# EAGLE board MM-Qwiic-Snap-2x1-Panel (EAGLE 9.6.2), part 1 of 2
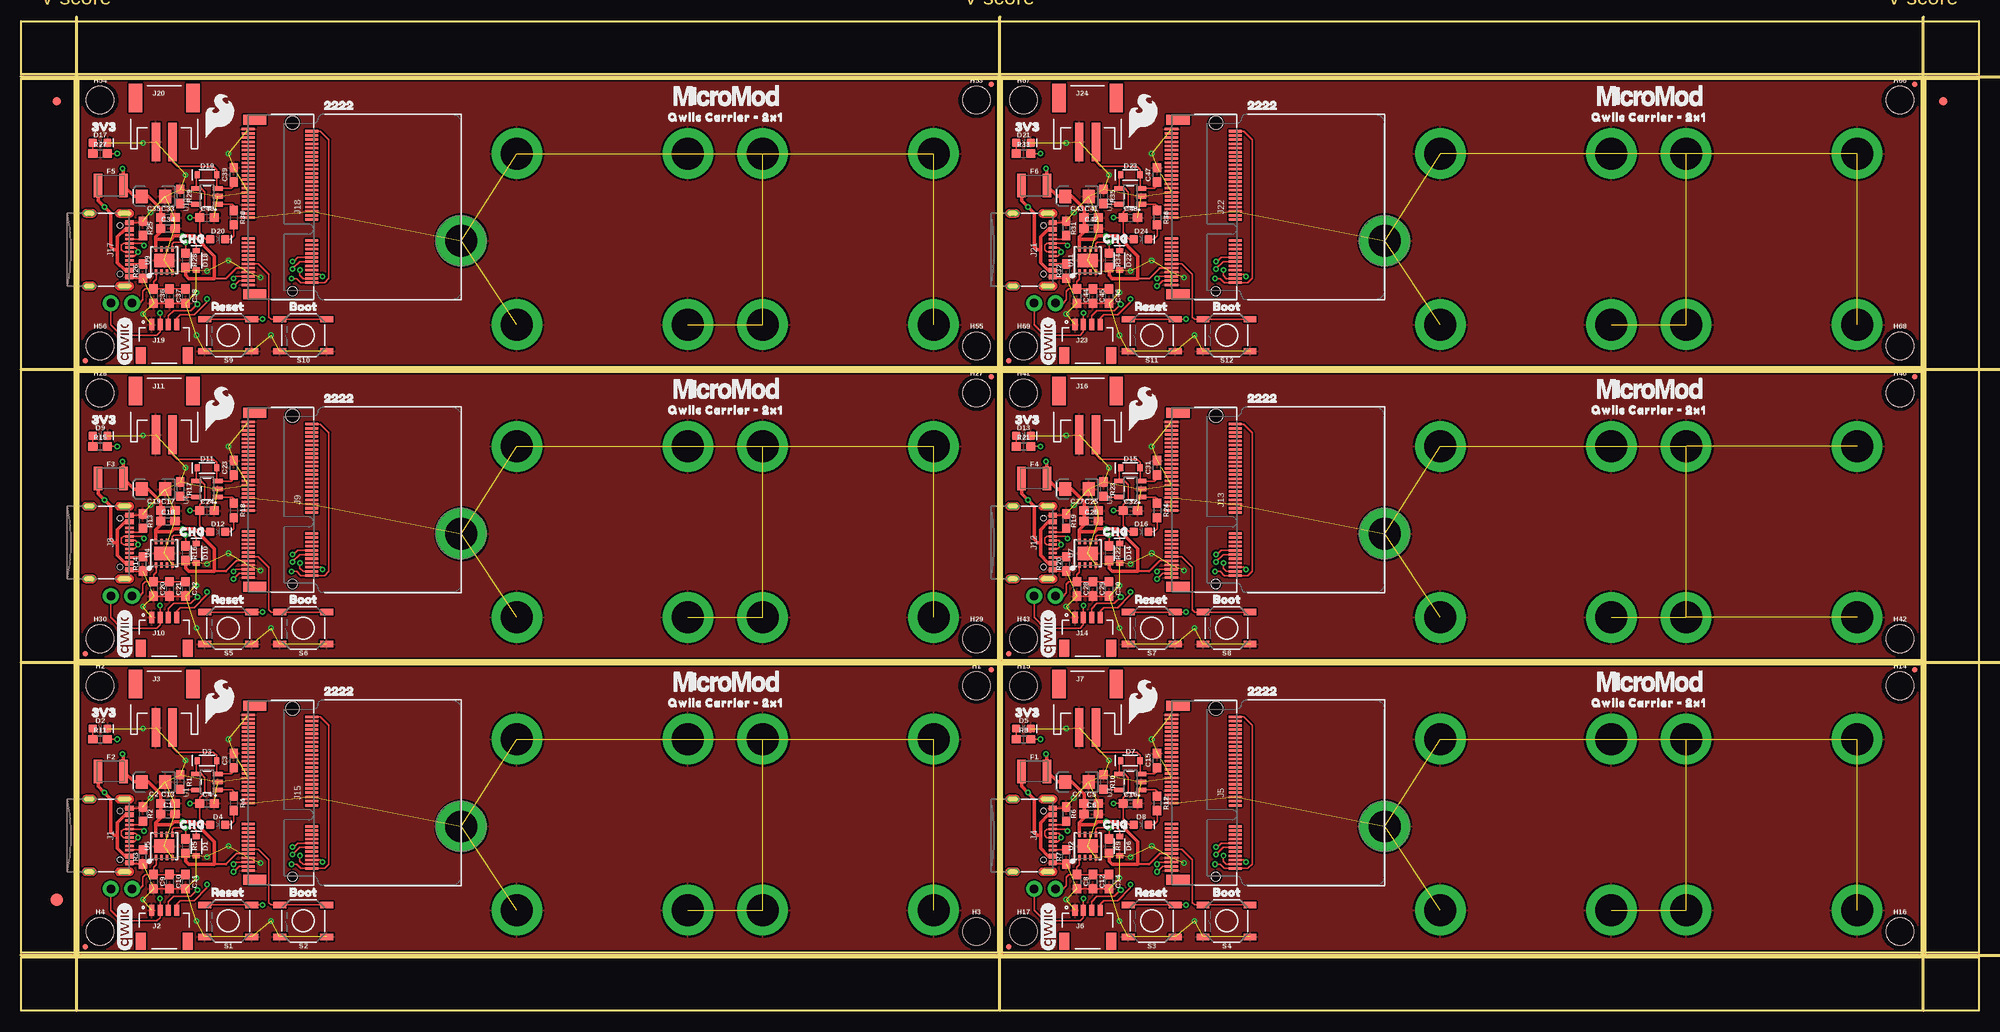
[diagram p0: board, top side]
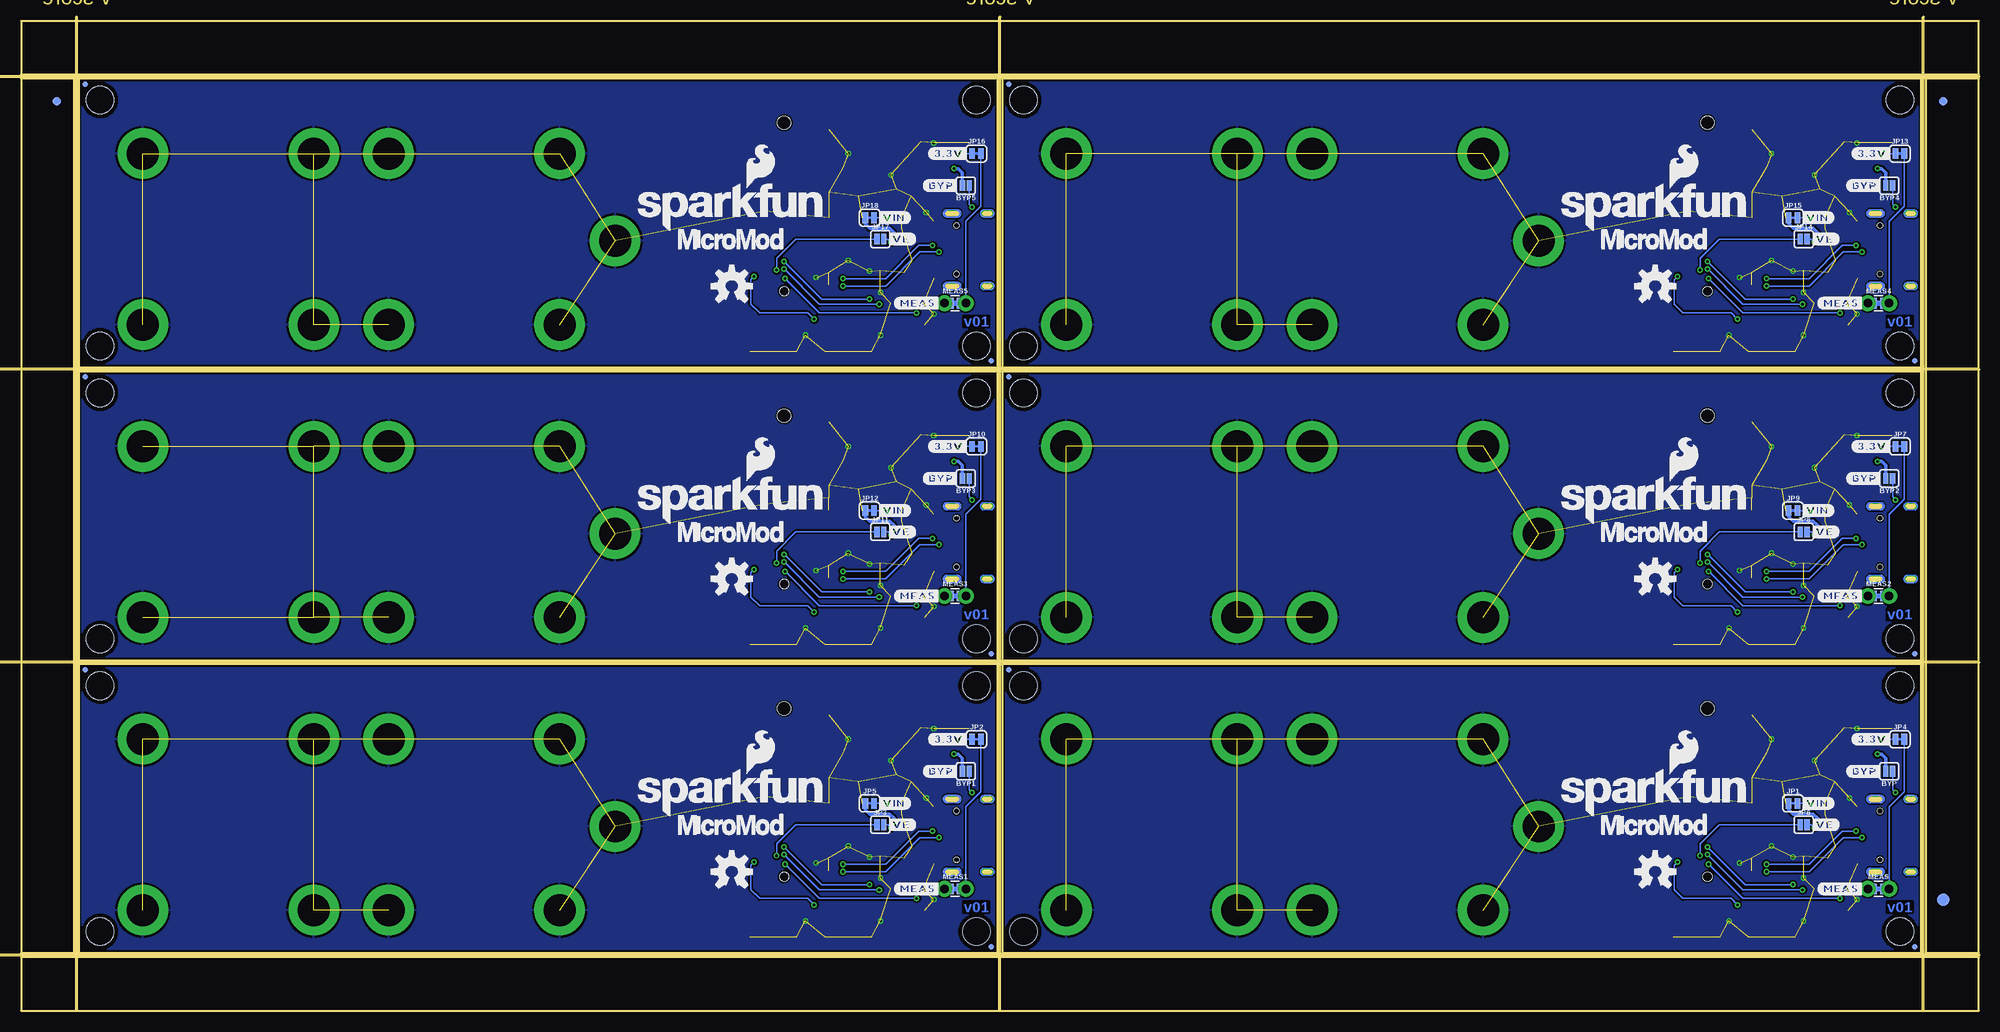
[diagram p1: board, bottom side, seen from below]

Size 232.66 x 117.6 mm. Coordinates in mm from the lower left corner, seen from the top.
Outline: 6.86,6.86 6.86,41.15 116.08,41.15 116.08,6.86 6.86,6.86
Outline: 116.59,6.86 116.59,41.15 225.81,41.15 225.81,6.86 116.59,6.86
Outline: 6.86,41.66 6.86,75.95 116.08,75.95 116.08,41.66 6.86,41.66
Outline: 116.59,41.66 116.59,75.95 225.81,75.95 225.81,41.66 116.59,41.66
Outline: 6.86,76.45 6.86,110.74 116.08,110.74 116.08,76.45 6.86,76.45
Outline: 116.59,76.45 116.59,110.74 225.81,110.74 225.81,76.45 116.59,76.45
Outline: 0,6.35 232.66,6.35 232.66,0 0,0 0,6.35
Outline: 226.31,110.74 232.66,110.74 232.66,6.86 226.31,6.86 226.31,110.74
Outline: 0,117.6 232.66,117.6 232.66,111.25 0,111.25 0,117.6
Outline: 0,110.74 6.35,110.74 6.35,6.86 0,6.86 0,110.74
Copper layers (1*16): Top 0.035mm / dielectric 1.5mm / Bottom 0.035mm
Design rules "MM-Qwiic-Snap-2x1": minimum track width 7mil, minimum drill 12mil, track to track 7mil, track to pad 7mil, pad to pad 7mil, via to via 7mil, smd to smd 7mil, copper to edge 7mil, drill to drill 7mil, minimum pad ring 7mil, minimum via ring 7mil, stop-mask expansion 4mil, vias tented up to drill 25mil, thermal gap 10mil
Net classes: 0 default: width 0 mm, drill 0 mm
Milling: 7 lines

## Footprints (pad centres in the part's own frame; a part is rotated, then mirrored left to right if it is on the bottom)
SMT-JUMPER_2_NO_SILK = smd 0.635 x 1.27: 1 -0.406,0; 2 0.406,0
0603 = smd 1.1 x 1: 1 -0.85,0; 2 0.85,0
EIA3216 = smd 1.4 x 1.6: + 1.4,0; - -1.4,0
SOD-323 = smd 0.63 x 0.83: A 1.15,0; C -1.15,0
LED-0603 = smd 1 x 1: A -0.877,0; C 0.877,0
FIDUCIAL-1X2 = smd 1 x 1: 1 0,0
FIDUCIAL-1.5X3 = smd 1.5 x 1.5: 1 0,0
1210 = smd 1 x 2.8: 1 -1.5,0; 2 1.5,0
FIDUCIAL-MICRO = smd 0.635 x 0.635: 1 0,0
STAND-OFF = hole 3.302: 0,0
STAND-OFF-REFLOW-M2.5 = drill 3.8 pad 6: 1 0,0
USB-C-16P-2LAYER-PADS = smd 0.3 x 1: A5 -1.25,-0.34; A6 -0.25,-0.34; A7 0.25,-0.34; A8 1.25,-0.34; B5 1.75,-0.34; B6 0.75,-0.34; B7 -0.75,-0.34; B8 -1.75,-0.34 | smd 0.6 x 1: GND -3.225,-0.34; GND2 3.225,-0.34; VBUS1 -2.45,-0.34; VBUS2 2.45,-0.34 | drill 0.4 pad 0.6 long: SHLD1 -4.318,-0.915; SHLD2 4.318,-0.915; SHLD3 -4.318,-5.095; SHLD4 4.318,-5.095 | hole 0.65: -2.89,-1.445; 2.89,-1.445
JST04_1MM_RA = smd 0.6 x 1.35: 1 -1.5,0; 2 -0.5,0; 3 0.5,0; 4 1.5,0 | smd 1.2 x 2: NC1 2.8,-3.675; NC2 -2.8,-3.675
JST-2-SMD = smd 1 x 4.6: 1 -1,-3.7; 2 1,-3.7 | smd 1.6 x 3.4: NC1 -3.4,1.5; NC2 3.4,1.5
M.2-CONNECTOR-E = smd 0.3 x 1.55: 1 9.25,-5.275; 2 9,2.275; 3 8.75,-5.275; 4 8.5,2.275; 5 8.25,-5.275; 6 8,2.275; 7 7.75,-5.275; 8 7.5,2.275; 9 7.25,-5.275; 10 7,2.275; 11 6.75,-5.275; 12 6.5,2.275; 13 6.25,-5.275; 14 6,2.275; 15 5.75,-5.275; 16 5.5,2.275; 17 5.25,-5.275; 18 5,2.275; 19 4.75,-5.275; 20 4.5,2.275; 21 4.25,-5.275; 22 4,2.275; 23 3.75,-5.275; 32 1.5,2.275; 33 1.25,-5.275; 34 1,2.275; 35 0.75,-5.275; 36 0.5,2.275; 37 0.25,-5.275; 38 0,2.275; 39 -0.25,-5.275; 40 -0.5,2.275; 41 -0.75,-5.275; 42 -1,2.275; 43 -1.25,-5.275; 44 -1.5,2.275; 45 -1.75,-5.275; 46 -2,2.275; 47 -2.25,-5.275; 48 -2.5,2.275; 49 -2.75,-5.275; 50 -3,2.275; 51 -3.25,-5.275; 52 -3.5,2.275; 53 -3.75,-5.275; 54 -4,2.275; 55 -4.25,-5.275; 56 -4.5,2.275; 57 -4.75,-5.275; 58 -5,2.275; 59 -5.25,-5.275; 60 -5.5,2.275; 61 -5.75,-5.275; 62 -6,2.275; 63 -6.25,-5.275; 64 -6.5,2.275; 65 -6.75,-5.275; 66 -7,2.275; 67 -7.25,-5.275; 68 -7.5,2.275; 69 -7.75,-5.275; 70 -8,2.275; 71 -8.25,-5.275; 72 -8.5,2.275; 73 -8.75,-5.275; 74 -9,2.275; 75 -9.25,-5.275 | smd 1.2 x 2.75: A1 10.35,-4.5; A2 -10.35,-4.5 | hole 1.1: 10,0 | hole 1.6: -10,0
SMT-JUMPER_2_NC_TRACE_SILK = smd 0.66 x 1.27: 1 -0.521,0; 2 0.521,0
COMBO-JUMPER_2_NC_TRACE = smd 0.635 x 1.27: 1 -0.508,0; 2 0.508,0 | drill 1.016 pad 1.88: 3 -1.27,0; 4 1.27,0
TACTILE_SWITCH_SMD_5.2MM = smd 1.524 x 0.762: 1 -2.794,1.905; 2 2.794,1.905; 3 -2.794,-1.905; 4 2.794,-1.905
SOT23-5 = smd 0.55 x 1.2: 1 -0.95,-1.3; 2 0,-1.3; 3 0.95,-1.3; 4 0.95,1.3; 5 -0.95,1.3
UDFN-8 = smd 0.3 x 0.65: 1 -0.975,-1.375; 2 -0.325,-1.375; 3 0.325,-1.375; 4 0.975,-1.375; 5 0.975,1.375; 6 0.325,1.375; 7 -0.325,1.375; 8 -0.975,1.375 | smd 2.35 x 1.6: EP 0,0

## Placement (x,y rotation side)
BYP  JUMPER-SMT_2_NO_SILK  [SMT-JUMPER_2_NO_SILK]  10.67,28.45 180 bottom
BYP1  JUMPER-SMT_2_NO_SILK  [SMT-JUMPER_2_NO_SILK]  120.4,28.45 180 bottom
BYP2  JUMPER-SMT_2_NO_SILK  [SMT-JUMPER_2_NO_SILK]  10.67,63.25 180 bottom
BYP3  JUMPER-SMT_2_NO_SILK  [SMT-JUMPER_2_NO_SILK]  120.4,63.25 180 bottom
BYP4  JUMPER-SMT_2_NO_SILK  [SMT-JUMPER_2_NO_SILK]  10.67,98.04 180 bottom
BYP5  JUMPER-SMT_2_NO_SILK  [SMT-JUMPER_2_NO_SILK]  120.4,98.04 180 bottom
C1  0.1uF  [0603]  17.44,23.37 0 top
C2  10uF  [EIA3216]  15.75,27.18 180 top
C3  4.7uF  [0603]  25.27,29.72 90 top
C4  4.7uF  [0603]  22.1,24.64 0 top
C5  0.22uF  [0603]  127.17,24.64 0 top
C6  0.1uF  [0603]  127.17,23.37 0 top
C7  10uF  [EIA3216]  125.48,27.18 180 top
C8  10uF  [0603]  125.48,15.33 270 top
C9  10uF  [0603]  15.75,15.33 270 top
C10  1.0uF  [0603]  17.65,15.33 270 top
C11  0.22uF  [0603]  19.56,15.33 270 top
C12  1.0uF  [0603]  127.38,15.33 270 top
C13  0.22uF  [0603]  17.44,24.64 0 top
C14  0.22uF  [0603]  129.29,15.33 270 top
C15  4.7uF  [0603]  135,29.72 90 top
C16  4.7uF  [0603]  131.83,24.64 0 top
C17  0.22uF  [0603]  17.44,59.44 0 top
C18  0.1uF  [0603]  17.44,58.17 0 top
C19  10uF  [EIA3216]  15.75,61.98 180 top
C20  10uF  [0603]  15.75,50.13 270 top
C21  1.0uF  [0603]  17.65,50.13 270 top
C22  0.22uF  [0603]  19.56,50.13 270 top
C23  4.7uF  [0603]  25.27,64.52 90 top
C24  4.7uF  [0603]  22.1,59.44 0 top
C25  0.22uF  [0603]  127.17,59.44 0 top
C26  0.1uF  [0603]  127.17,58.17 0 top
C27  10uF  [EIA3216]  125.48,61.98 180 top
C28  10uF  [0603]  125.48,50.13 270 top
C29  1.0uF  [0603]  127.38,50.13 270 top
C30  0.22uF  [0603]  129.29,50.13 270 top
C31  4.7uF  [0603]  135,64.52 90 top
C32  4.7uF  [0603]  131.83,59.44 0 top
C33  0.22uF  [0603]  17.44,94.23 0 top
C34  0.1uF  [0603]  17.44,92.96 0 top
C35  10uF  [EIA3216]  15.75,96.77 180 top
C36  10uF  [0603]  15.75,84.92 270 top
C37  1.0uF  [0603]  17.65,84.92 270 top
C38  0.22uF  [0603]  19.56,84.92 270 top
C39  4.7uF  [0603]  25.27,99.31 90 top
C40  4.7uF  [0603]  22.1,94.23 0 top
C41  0.22uF  [0603]  127.17,94.23 0 top
C42  0.1uF  [0603]  127.17,92.96 0 top
C43  10uF  [EIA3216]  125.48,96.77 180 top
C44  10uF  [0603]  125.48,84.92 270 top
C45  1.0uF  [0603]  127.38,84.92 270 top
C46  0.22uF  [0603]  129.29,84.92 270 top
C47  4.7uF  [0603]  135,99.31 90 top
C48  4.7uF  [0603]  131.83,94.23 0 top
D1  3.3V  [SOD-323]  20.83,19.56 270 top
D2  RED  [LED-0603]  9.4,33.53 0 top
D3  3A/10V/280mV  [SOD-323]  22.1,29.72 0 top
D4  Yellow  [LED-0603]  23.37,22.1 0 top
D5  RED  [LED-0603]  119.13,33.53 0 top
D6  3.3V  [SOD-323]  130.56,19.56 270 top
D7  3A/10V/280mV  [SOD-323]  131.83,29.72 0 top
D8  Yellow  [LED-0603]  133.1,22.1 0 top
D9  RED  [LED-0603]  9.4,68.33 0 top
D10  3.3V  [SOD-323]  20.83,54.36 270 top
D11  3A/10V/280mV  [SOD-323]  22.1,64.52 0 top
D12  Yellow  [LED-0603]  23.37,56.9 0 top
D13  RED  [LED-0603]  119.13,68.33 0 top
D14  3.3V  [SOD-323]  130.56,54.36 270 top
D15  3A/10V/280mV  [SOD-323]  131.83,64.52 0 top
D16  Yellow  [LED-0603]  133.1,56.9 0 top
D17  RED  [LED-0603]  9.4,103.12 0 top
D18  3.3V  [SOD-323]  20.83,89.15 270 top
D19  3A/10V/280mV  [SOD-323]  22.1,99.31 0 top
D20  Yellow  [LED-0603]  23.37,91.69 0 top
D21  RED  [LED-0603]  119.13,103.12 0 top
D22  3.3V  [SOD-323]  130.56,89.15 270 top
D23  3A/10V/280mV  [SOD-323]  131.83,99.31 0 top
D24  Yellow  [LED-0603]  133.1,91.69 0 top
E$1  [FIDUCIAL-1X2]  4.23,108.08 0 top
E$2  [FIDUCIAL-1X2]  4.23,108.08 0 bottom
E$3  [FIDUCIAL-1X2]  228.43,108.08 0 top
E$4  [FIDUCIAL-1X2]  228.43,108.08 0 bottom
E$5  [FIDUCIAL-1.5X3]  4.23,13.21 0 top
E$6  [FIDUCIAL-1.5X3]  4.23,13.21 0 bottom
F1  6V/2A  [1210]  120.4,28.45 0 top
F2  6V/2A  [1210]  10.67,28.45 0 top
F3  6V/2A  [1210]  10.67,63.25 0 top
F4  6V/2A  [1210]  120.4,63.25 0 top
F5  6V/2A  [1210]  10.67,98.04 0 top
F6  6V/2A  [1210]  120.4,98.04 0 top
FD1  FIDUCIALUFIDUCIAL  [FIDUCIAL-MICRO]  7.62,7.62 0 top
FD2  FIDUCIALUFIDUCIAL  [FIDUCIAL-MICRO]  115.32,40.51 0 top
FD3  FIDUCIALUFIDUCIAL  [FIDUCIAL-MICRO]  7.62,7.62 0 bottom
FD4  FIDUCIALUFIDUCIAL  [FIDUCIAL-MICRO]  115.32,40.51 0 bottom
FD5  FIDUCIALUFIDUCIAL  [FIDUCIAL-MICRO]  117.35,7.62 0 top
FD6  FIDUCIALUFIDUCIAL  [FIDUCIAL-MICRO]  225.04,40.51 0 top
FD7  FIDUCIALUFIDUCIAL  [FIDUCIAL-MICRO]  117.35,7.62 0 bottom
FD8  FIDUCIALUFIDUCIAL  [FIDUCIAL-MICRO]  225.04,40.51 0 bottom
FD9  FIDUCIALUFIDUCIAL  [FIDUCIAL-MICRO]  7.62,42.42 0 top
FD10  FIDUCIALUFIDUCIAL  [FIDUCIAL-MICRO]  115.32,75.31 0 top
FD11  FIDUCIALUFIDUCIAL  [FIDUCIAL-MICRO]  7.62,42.42 0 bottom
FD12  FIDUCIALUFIDUCIAL  [FIDUCIAL-MICRO]  115.32,75.31 0 bottom
FD13  FIDUCIALUFIDUCIAL  [FIDUCIAL-MICRO]  117.35,42.42 0 top
FD14  FIDUCIALUFIDUCIAL  [FIDUCIAL-MICRO]  225.04,75.31 0 top
FD15  FIDUCIALUFIDUCIAL  [FIDUCIAL-MICRO]  117.35,42.42 0 bottom
FD16  FIDUCIALUFIDUCIAL  [FIDUCIAL-MICRO]  225.04,75.31 0 bottom
FD17  FIDUCIALUFIDUCIAL  [FIDUCIAL-MICRO]  7.62,77.22 0 top
FD18  FIDUCIALUFIDUCIAL  [FIDUCIAL-MICRO]  115.32,110.11 0 top
FD19  FIDUCIALUFIDUCIAL  [FIDUCIAL-MICRO]  7.62,77.22 0 bottom
FD20  FIDUCIALUFIDUCIAL  [FIDUCIAL-MICRO]  115.32,110.11 0 bottom
FD21  FIDUCIALUFIDUCIAL  [FIDUCIAL-MICRO]  117.35,77.22 0 top
FD22  FIDUCIALUFIDUCIAL  [FIDUCIAL-MICRO]  225.04,110.11 0 top
FD23  FIDUCIALUFIDUCIAL  [FIDUCIAL-MICRO]  117.35,77.22 0 bottom
FD24  FIDUCIALUFIDUCIAL  [FIDUCIAL-MICRO]  225.04,110.11 0 bottom
H1  STAND-OFF  [STAND-OFF]  113.54,38.61 0 top
H2  STAND-OFF  [STAND-OFF]  9.4,38.61 0 top
H3  STAND-OFF  [STAND-OFF]  113.54,9.4 0 top
H4  STAND-OFF  [STAND-OFF]  9.4,9.4 0 top
H5  STAND-OFF-REFLOW2.5MM_TALL  [STAND-OFF-REFLOW-M2.5]  52.33,21.89 0 top
H6  STAND-OFF-REFLOW2.5MM_TALL  [STAND-OFF-REFLOW-M2.5]  58.93,32.26 0 top
H7  STAND-OFF-REFLOW2.5MM_TALL  [STAND-OFF-REFLOW-M2.5]  58.93,11.94 0 top
H8  STAND-OFF-REFLOW2.5MM_TALL  [STAND-OFF-REFLOW-M2.5]  79.25,11.94 0 top
H9  STAND-OFF-REFLOW2.5MM_TALL  [STAND-OFF-REFLOW-M2.5]  79.25,32.26 0 top
H10  STAND-OFF-REFLOW2.5MM_TALL  [STAND-OFF-REFLOW-M2.5]  88.14,32.26 0 top
H11  STAND-OFF-REFLOW2.5MM_TALL  [STAND-OFF-REFLOW-M2.5]  108.46,32.26 0 top
H12  STAND-OFF-REFLOW2.5MM_TALL  [STAND-OFF-REFLOW-M2.5]  108.46,11.94 0 top
H13  STAND-OFF-REFLOW2.5MM_TALL  [STAND-OFF-REFLOW-M2.5]  88.14,11.94 0 top
H14  STAND-OFF  [STAND-OFF]  223.27,38.61 0 top
H15  STAND-OFF  [STAND-OFF]  119.13,38.61 0 top
H16  STAND-OFF  [STAND-OFF]  223.27,9.4 0 top
H17  STAND-OFF  [STAND-OFF]  119.13,9.4 0 top
H18  STAND-OFF-REFLOW2.5MM_TALL  [STAND-OFF-REFLOW-M2.5]  162.06,21.89 0 top
H19  STAND-OFF-REFLOW2.5MM_TALL  [STAND-OFF-REFLOW-M2.5]  168.66,32.26 0 top
H20  STAND-OFF-REFLOW2.5MM_TALL  [STAND-OFF-REFLOW-M2.5]  168.66,11.94 0 top
H21  STAND-OFF-REFLOW2.5MM_TALL  [STAND-OFF-REFLOW-M2.5]  188.98,11.94 0 top
H22  STAND-OFF-REFLOW2.5MM_TALL  [STAND-OFF-REFLOW-M2.5]  188.98,32.26 0 top
H23  STAND-OFF-REFLOW2.5MM_TALL  [STAND-OFF-REFLOW-M2.5]  197.87,32.26 0 top
H24  STAND-OFF-REFLOW2.5MM_TALL  [STAND-OFF-REFLOW-M2.5]  218.19,32.26 0 top
H25  STAND-OFF-REFLOW2.5MM_TALL  [STAND-OFF-REFLOW-M2.5]  218.19,11.94 0 top
H26  STAND-OFF-REFLOW2.5MM_TALL  [STAND-OFF-REFLOW-M2.5]  197.87,11.94 0 top
H27  STAND-OFF  [STAND-OFF]  113.54,73.41 0 top
H28  STAND-OFF  [STAND-OFF]  9.4,73.41 0 top
H29  STAND-OFF  [STAND-OFF]  113.54,44.2 0 top
H30  STAND-OFF  [STAND-OFF]  9.4,44.2 0 top
H31  STAND-OFF-REFLOW2.5MM_TALL  [STAND-OFF-REFLOW-M2.5]  52.33,56.69 0 top
H32  STAND-OFF-REFLOW2.5MM_TALL  [STAND-OFF-REFLOW-M2.5]  58.93,67.06 0 top
H33  STAND-OFF-REFLOW2.5MM_TALL  [STAND-OFF-REFLOW-M2.5]  58.93,46.74 0 top
H34  STAND-OFF-REFLOW2.5MM_TALL  [STAND-OFF-REFLOW-M2.5]  79.25,46.74 0 top
H35  STAND-OFF-REFLOW2.5MM_TALL  [STAND-OFF-REFLOW-M2.5]  79.25,67.06 0 top
H36  STAND-OFF-REFLOW2.5MM_TALL  [STAND-OFF-REFLOW-M2.5]  88.14,67.06 0 top
H37  STAND-OFF-REFLOW2.5MM_TALL  [STAND-OFF-REFLOW-M2.5]  108.46,67.06 0 top
H38  STAND-OFF-REFLOW2.5MM_TALL  [STAND-OFF-REFLOW-M2.5]  108.46,46.74 0 top
H39  STAND-OFF-REFLOW2.5MM_TALL  [STAND-OFF-REFLOW-M2.5]  88.14,46.74 0 top
H40  STAND-OFF  [STAND-OFF]  223.27,73.41 0 top
H41  STAND-OFF  [STAND-OFF]  119.13,73.41 0 top
H42  STAND-OFF  [STAND-OFF]  223.27,44.2 0 top
H43  STAND-OFF  [STAND-OFF]  119.13,44.2 0 top
H44  STAND-OFF-REFLOW2.5MM_TALL  [STAND-OFF-REFLOW-M2.5]  162.06,56.69 0 top
H45  STAND-OFF-REFLOW2.5MM_TALL  [STAND-OFF-REFLOW-M2.5]  168.66,67.06 0 top
H46  STAND-OFF-REFLOW2.5MM_TALL  [STAND-OFF-REFLOW-M2.5]  168.66,46.74 0 top
H47  STAND-OFF-REFLOW2.5MM_TALL  [STAND-OFF-REFLOW-M2.5]  188.98,46.74 0 top
H48  STAND-OFF-REFLOW2.5MM_TALL  [STAND-OFF-REFLOW-M2.5]  188.98,67.06 0 top
H49  STAND-OFF-REFLOW2.5MM_TALL  [STAND-OFF-REFLOW-M2.5]  197.87,67.06 0 top
H50  STAND-OFF-REFLOW2.5MM_TALL  [STAND-OFF-REFLOW-M2.5]  218.19,67.06 0 top
H51  STAND-OFF-REFLOW2.5MM_TALL  [STAND-OFF-REFLOW-M2.5]  218.19,46.74 0 top
H52  STAND-OFF-REFLOW2.5MM_TALL  [STAND-OFF-REFLOW-M2.5]  197.87,46.74 0 top
H53  STAND-OFF  [STAND-OFF]  113.54,108.2 0 top
H54  STAND-OFF  [STAND-OFF]  9.4,108.2 0 top
H55  STAND-OFF  [STAND-OFF]  113.54,78.99 0 top
H56  STAND-OFF  [STAND-OFF]  9.4,78.99 0 top
H57  STAND-OFF-REFLOW2.5MM_TALL  [STAND-OFF-REFLOW-M2.5]  52.33,91.48 0 top
H58  STAND-OFF-REFLOW2.5MM_TALL  [STAND-OFF-REFLOW-M2.5]  58.93,101.85 0 top
H59  STAND-OFF-REFLOW2.5MM_TALL  [STAND-OFF-REFLOW-M2.5]  58.93,81.53 0 top
H60  STAND-OFF-REFLOW2.5MM_TALL  [STAND-OFF-REFLOW-M2.5]  79.25,81.53 0 top
H61  STAND-OFF-REFLOW2.5MM_TALL  [STAND-OFF-REFLOW-M2.5]  79.25,101.85 0 top
H62  STAND-OFF-REFLOW2.5MM_TALL  [STAND-OFF-REFLOW-M2.5]  88.14,101.85 0 top
H63  STAND-OFF-REFLOW2.5MM_TALL  [STAND-OFF-REFLOW-M2.5]  108.46,101.85 0 top
H64  STAND-OFF-REFLOW2.5MM_TALL  [STAND-OFF-REFLOW-M2.5]  108.46,81.53 0 top
H65  STAND-OFF-REFLOW2.5MM_TALL  [STAND-OFF-REFLOW-M2.5]  88.14,81.53 0 top
H66  STAND-OFF  [STAND-OFF]  223.27,108.2 0 top
H67  STAND-OFF  [STAND-OFF]  119.13,108.2 0 top
H68  STAND-OFF  [STAND-OFF]  223.27,78.99 0 top
H69  STAND-OFF  [STAND-OFF]  119.13,78.99 0 top
H70  STAND-OFF-REFLOW2.5MM_TALL  [STAND-OFF-REFLOW-M2.5]  162.06,91.48 0 top
H71  STAND-OFF-REFLOW2.5MM_TALL  [STAND-OFF-REFLOW-M2.5]  168.66,101.85 0 top
H72  STAND-OFF-REFLOW2.5MM_TALL  [STAND-OFF-REFLOW-M2.5]  168.66,81.53 0 top
H73  STAND-OFF-REFLOW2.5MM_TALL  [STAND-OFF-REFLOW-M2.5]  188.98,81.53 0 top
H74  STAND-OFF-REFLOW2.5MM_TALL  [STAND-OFF-REFLOW-M2.5]  188.98,101.85 0 top
H75  STAND-OFF-REFLOW2.5MM_TALL  [STAND-OFF-REFLOW-M2.5]  197.87,101.85 0 top
H76  STAND-OFF-REFLOW2.5MM_TALL  [STAND-OFF-REFLOW-M2.5]  218.19,101.85 0 top
H77  STAND-OFF-REFLOW2.5MM_TALL  [STAND-OFF-REFLOW-M2.5]  218.19,81.53 0 top
H78  STAND-OFF-REFLOW2.5MM_TALL  [STAND-OFF-REFLOW-M2.5]  197.87,81.53 0 top
J1  [USB-C-16P-2LAYER-PADS]  13.21,20.83 270 top
J2  QWIIC_RIGHT_ANGLE  [JST04_1MM_RA]  17.02,11.94 0 top
J3  [JST-2-SMD]  17.02,37.34 0 top
J4  [USB-C-16P-2LAYER-PADS]  122.94,20.83 270 top
J5  MICROMOD-2222-C  [M.2-CONNECTOR-E]  141.99,25.91 270 top
J6  QWIIC_RIGHT_ANGLE  [JST04_1MM_RA]  126.75,11.94 0 top
J7  [JST-2-SMD]  126.75,37.34 0 top
J8  [USB-C-16P-2LAYER-PADS]  13.21,55.63 270 top
J9  MICROMOD-2222-C  [M.2-CONNECTOR-E]  32.26,60.71 270 top
J10  QWIIC_RIGHT_ANGLE  [JST04_1MM_RA]  17.02,46.74 0 top
J11  [JST-2-SMD]  17.02,72.14 0 top
J12  [USB-C-16P-2LAYER-PADS]  122.94,55.63 270 top
J13  MICROMOD-2222-C  [M.2-CONNECTOR-E]  141.99,60.71 270 top
J14  QWIIC_RIGHT_ANGLE  [JST04_1MM_RA]  126.75,46.74 0 top
J15  MICROMOD-2222-C  [M.2-CONNECTOR-E]  32.26,25.91 270 top
J16  [JST-2-SMD]  126.75,72.14 0 top
J17  [USB-C-16P-2LAYER-PADS]  13.21,90.42 270 top
J18  MICROMOD-2222-C  [M.2-CONNECTOR-E]  32.26,95.5 270 top
J19  QWIIC_RIGHT_ANGLE  [JST04_1MM_RA]  17.02,81.53 0 top
J20  [JST-2-SMD]  17.02,106.93 0 top
J21  [USB-C-16P-2LAYER-PADS]  122.94,90.42 270 top
J22  MICROMOD-2222-C  [M.2-CONNECTOR-E]  141.99,95.5 270 top
J23  QWIIC_RIGHT_ANGLE  [JST04_1MM_RA]  126.75,81.53 0 top
J24  [JST-2-SMD]  126.75,106.93 0 top
JP1  JUMPER-SMT_2_NC_TRACE_SILK  [SMT-JUMPER_2_NC_TRACE_SILK]  22.1,24.64 0 bottom
JP2  3V3 LED  [SMT-JUMPER_2_NC_TRACE_SILK]  119.13,32.26 0 bottom
JP3  VE  [SMT-JUMPER_2_NO_SILK]  130.56,22.1 0 bottom
JP4  3V3 LED  [SMT-JUMPER_2_NC_TRACE_SILK]  9.4,32.26 0 bottom
JP5  JUMPER-SMT_2_NC_TRACE_SILK  [SMT-JUMPER_2_NC_TRACE_SILK]  131.83,24.64 0 bottom
JP6  VE  [SMT-JUMPER_2_NO_SILK]  20.83,22.1 0 bottom
JP7  3V3 LED  [SMT-JUMPER_2_NC_TRACE_SILK]  9.4,67.06 0 bottom
JP8  VE  [SMT-JUMPER_2_NO_SILK]  20.83,56.9 0 bottom
JP9  JUMPER-SMT_2_NC_TRACE_SILK  [SMT-JUMPER_2_NC_TRACE_SILK]  22.1,59.44 0 bottom
JP10  3V3 LED  [SMT-JUMPER_2_NC_TRACE_SILK]  119.13,67.06 0 bottom
JP11  VE  [SMT-JUMPER_2_NO_SILK]  130.56,56.9 0 bottom
JP12  JUMPER-SMT_2_NC_TRACE_SILK  [SMT-JUMPER_2_NC_TRACE_SILK]  131.83,59.44 0 bottom
JP13  3V3 LED  [SMT-JUMPER_2_NC_TRACE_SILK]  9.4,101.85 0 bottom
JP14  VE  [SMT-JUMPER_2_NO_SILK]  20.83,91.69 0 bottom
JP15  JUMPER-SMT_2_NC_TRACE_SILK  [SMT-JUMPER_2_NC_TRACE_SILK]  22.1,94.23 0 bottom
JP16  3V3 LED  [SMT-JUMPER_2_NC_TRACE_SILK]  119.13,101.85 0 bottom
JP17  VE  [SMT-JUMPER_2_NO_SILK]  130.56,91.69 0 bottom
JP18  JUMPER-SMT_2_NC_TRACE_SILK  [SMT-JUMPER_2_NC_TRACE_SILK]  131.83,94.23 0 bottom
LOGO1  SFE_LOGO_NAME_FLAME.2_INCH  [SFE_LOGO_NAME_FLAME_.2]  38.61,25.91 0 bottom
LOGO2  QWIIC_LOGO_CONNECTOR  [QWIIC_5.5MM]  12.32,9.97 90 top
LOGO3  OSHW-LOGOM  [OSHW-LOGO-M]  38.48,16.51 0 bottom
LOGO4  QWIIC_LOGO_CONNECTOR  [QWIIC_5.5MM]  122.05,9.97 90 top
LOGO5  OSHW-LOGOM  [OSHW-LOGO-M]  148.21,16.51 0 bottom
LOGO6  SFE_LOGO_NAME_FLAME.2_INCH  [SFE_LOGO_NAME_FLAME_.2]  148.34,25.91 0 bottom
LOGO7  QWIIC_LOGO_CONNECTOR  [QWIIC_5.5MM]  12.32,44.77 90 top
LOGO8  OSHW-LOGOM  [OSHW-LOGO-M]  38.48,51.31 0 bottom
LOGO9  SFE_LOGO_NAME_FLAME.2_INCH  [SFE_LOGO_NAME_FLAME_.2]  38.61,60.71 0 bottom
LOGO10  QWIIC_LOGO_CONNECTOR  [QWIIC_5.5MM]  122.05,44.77 90 top
LOGO11  OSHW-LOGOM  [OSHW-LOGO-M]  148.21,51.31 0 bottom
LOGO12  SFE_LOGO_NAME_FLAME.2_INCH  [SFE_LOGO_NAME_FLAME_.2]  148.34,60.71 0 bottom
LOGO13  QWIIC_LOGO_CONNECTOR  [QWIIC_5.5MM]  12.32,79.57 90 top
LOGO14  OSHW-LOGOM  [OSHW-LOGO-M]  38.48,86.11 0 bottom
LOGO15  SFE_LOGO_NAME_FLAME.2_INCH  [SFE_LOGO_NAME_FLAME_.2]  38.61,95.5 0 bottom
LOGO16  QWIIC_LOGO_CONNECTOR  [QWIIC_5.5MM]  122.05,79.57 90 top
LOGO17  OSHW-LOGOM  [OSHW-LOGO-M]  148.21,86.11 0 bottom
LOGO18  SFE_LOGO_NAME_FLAME.2_INCH  [SFE_LOGO_NAME_FLAME_.2]  148.34,95.5 0 bottom
MEAS  [COMBO-JUMPER_2_NC_TRACE]  11.94,14.48 0 bottom
MEAS1  [COMBO-JUMPER_2_NC_TRACE]  121.67,14.48 0 bottom
MEAS2  [COMBO-JUMPER_2_NC_TRACE]  11.94,49.28 0 bottom
MEAS3  [COMBO-JUMPER_2_NC_TRACE]  121.67,49.28 0 bottom
MEAS4  [COMBO-JUMPER_2_NC_TRACE]  11.94,84.07 0 bottom
MEAS5  [COMBO-JUMPER_2_NC_TRACE]  121.67,84.07 0 bottom
R1  2.2k  [0603]  18.92,27.18 270 top
R2  5.1k  [0603]  14.48,23.37 270 top
R3  5.1k  [0603]  14.48,18.29 90 top
R4  1k  [0603]  25.27,24.64 270 top
R5  100k  [0603]  19.56,19.56 270 top
R6  5.1k  [0603]  124.21,23.37 270 top
R7  5.1k  [0603]  124.21,18.29 90 top
R8  1k  [0603]  119.13,32.26 0 top
R9  100k  [0603]  129.29,19.56 270 top
R10  2.2k  [0603]  128.65,27.18 270 top
R11  1k  [0603]  9.4,32.26 0 top
R12  1k  [0603]  135,24.64 270 top
R13  5.1k  [0603]  14.48,58.17 270 top
R14  5.1k  [0603]  14.48,53.09 90 top
R15  1k  [0603]  9.4,67.06 0 top
R16  100k  [0603]  19.56,54.36 270 top
R17  2.2k  [0603]  18.92,61.98 270 top
R18  1k  [0603]  25.27,59.44 270 top
R19  5.1k  [0603]  124.21,58.17 270 top
R20  5.1k  [0603]  124.21,53.09 90 top
R21  1k  [0603]  119.13,67.06 0 top
R22  100k  [0603]  129.29,54.36 270 top
R23  2.2k  [0603]  128.65,61.98 270 top
R24  1k  [0603]  135,59.44 270 top
R25  5.1k  [0603]  14.48,92.96 270 top
R26  5.1k  [0603]  14.48,87.88 90 top
R27  1k  [0603]  9.4,101.85 0 top
R28  100k  [0603]  19.56,89.15 270 top
R29  2.2k  [0603]  18.92,96.77 270 top
R30  1k  [0603]  25.27,94.23 270 top
R31  5.1k  [0603]  124.21,92.96 270 top
R32  5.1k  [0603]  124.21,87.88 90 top
R33  1k  [0603]  119.13,101.85 0 top
R34  100k  [0603]  129.29,89.15 270 top
R35  2.2k  [0603]  128.65,96.77 270 top
R36  1k  [0603]  135,94.23 270 top
S1  Reset  [TACTILE_SWITCH_SMD_5.2MM]  24.64,10.67 180 top
S2  BOOT  [TACTILE_SWITCH_SMD_5.2MM]  33.53,10.67 180 top
S3  Reset  [TACTILE_SWITCH_SMD_5.2MM]  134.37,10.67 180 top
S4  BOOT  [TACTILE_SWITCH_SMD_5.2MM]  143.26,10.67 180 top
S5  Reset  [TACTILE_SWITCH_SMD_5.2MM]  24.64,45.47 180 top
S6  BOOT  [TACTILE_SWITCH_SMD_5.2MM]  33.53,45.47 180 top
S7  Reset  [TACTILE_SWITCH_SMD_5.2MM]  134.37,45.47 180 top
S8  BOOT  [TACTILE_SWITCH_SMD_5.2MM]  143.26,45.47 180 top
S9  Reset  [TACTILE_SWITCH_SMD_5.2MM]  24.64,80.26 180 top
S10  BOOT  [TACTILE_SWITCH_SMD_5.2MM]  33.53,80.26 180 top
S11  Reset  [TACTILE_SWITCH_SMD_5.2MM]  134.37,80.26 180 top
S12  BOOT  [TACTILE_SWITCH_SMD_5.2MM]  143.26,80.26 180 top
U1  MCP73831  [SOT23-5]  22.1,27.18 90 top
U2  AP7361C-33FGEUDFN-8  [UDFN-8]  126.75,19.56 0 top
U3  MCP73831  [SOT23-5]  131.83,27.18 90 top
U4  AP7361C-33FGEUDFN-8  [UDFN-8]  17.02,54.36 0 top
U5  AP7361C-33FGEUDFN-8  [UDFN-8]  17.02,19.56 0 top
U6  MCP73831  [SOT23-5]  22.1,61.98 90 top
U7  AP7361C-33FGEUDFN-8  [UDFN-8]  126.75,54.36 0 top
U8  MCP73831  [SOT23-5]  131.83,61.98 90 top
U9  AP7361C-33FGEUDFN-8  [UDFN-8]  17.02,89.15 0 top
U10  MCP73831  [SOT23-5]  22.1,96.77 90 top
U11  AP7361C-33FGEUDFN-8  [UDFN-8]  126.75,89.15 0 top
U12  MCP73831  [SOT23-5]  131.83,96.77 90 top
U$1  [3V31]  7.49,35.43 0 top
U$2  [RESET3]  21.72,14.1 0 top
U$3  [RESET3]  131.44,14.1 0 top
U$4  [CHG0]  18.16,22.1 0 top
U$5  [#VIN#0]  21.21,24.64 0 bottom
U$6  [#3#3V#0]  15.11,32.26 0 bottom
U$7  [#BYP#0]  15.75,28.45 0 bottom
U$8  [#VE#0]  20.07,22.1 0 bottom
U$9  [#MEAS#0]  19.18,14.48 0 bottom
U$10  [QWIIC_CARRIER_#_2X10]  76.2,36.58 0 top
U$11  [BOOT2]  140.72,14.1 0 top
U$12  [22229]  144.82,37.98 0 top
U$13  [3V31]  117.22,35.43 0 top
U$14  [SFE_LOGO_FLAME_.2]  133.35,36.7 0 top
U$15  [MICROMOD_LOGO_.5]  193.55,39.12 0 top
U$16  [MICROMOD_LOGO_.5]  148.34,22.1 0 bottom
U$17  [CHG0]  127.89,22.1 0 top
U$18  [#3#3V#0]  124.84,32.26 0 bottom
U$19  [BOOT2]  30.99,14.1 0 top
U$20  [#BYP#0]  125.48,28.45 0 bottom
U$21  [#MEAS#0]  128.91,14.48 0 bottom
U$22  [#VIN#0]  130.94,24.64 0 bottom
U$23  [#VE#0]  129.79,22.1 0 bottom
U$24  [QWIIC_CARRIER_#_2X10]  185.93,36.58 0 top
U$25  [RESET3]  21.72,48.89 0 top
U$26  [BOOT2]  30.99,48.89 0 top
U$27  [22229]  35.09,72.78 0 top
U$28  [3V31]  7.49,70.23 0 top
U$29  [SFE_LOGO_FLAME_.2]  23.62,71.5 0 top
U$30  [MICROMOD_LOGO_.5]  83.82,73.91 0 top
U$31  [MICROMOD_LOGO_.5]  38.61,56.9 0 bottom
U$32  [CHG0]  18.16,56.9 0 top
U$33  [#3#3V#0]  15.11,67.06 0 bottom
U$34  [#BYP#0]  15.75,63.25 0 bottom
U$35  [#MEAS#0]  19.18,49.28 0 bottom
U$36  [#VIN#0]  21.21,59.44 0 bottom
U$37  [#VE#0]  20.07,56.9 0 bottom
U$38  [QWIIC_CARRIER_#_2X10]  76.2,71.37 0 top
U$39  [RESET3]  131.44,48.89 0 top
U$40  [BOOT2]  140.72,48.89 0 top
U$41  [22229]  144.82,72.78 0 top
U$42  [3V31]  117.22,70.23 0 top
U$43  [SFE_LOGO_FLAME_.2]  133.35,71.5 0 top
U$44  [SFE_LOGO_FLAME_.2]  23.62,36.7 0 top
U$45  [MICROMOD_LOGO_.5]  193.55,73.91 0 top
U$46  [MICROMOD_LOGO_.5]  148.34,56.9 0 bottom
U$47  [CHG0]  127.89,56.9 0 top
U$48  [#3#3V#0]  124.84,67.06 0 bottom
U$49  [#BYP#0]  125.48,63.25 0 bottom
U$50  [#MEAS#0]  128.91,49.28 0 bottom
U$51  [#VIN#0]  130.94,59.44 0 bottom
U$52  [#VE#0]  129.79,56.9 0 bottom
U$53  [QWIIC_CARRIER_#_2X10]  185.93,71.37 0 top
U$54  [RESET3]  21.72,83.69 0 top
U$55  [22229]  35.09,37.98 0 top
U$56  [BOOT2]  30.99,83.69 0 top
U$57  [22229]  35.09,107.57 0 top
U$58  [3V31]  7.49,105.03 0 top
U$59  [SFE_LOGO_FLAME_.2]  23.62,106.3 0 top
U$60  [MICROMOD_LOGO_.5]  83.82,108.71 0 top
U$61  [MICROMOD_LOGO_.5]  38.61,91.69 0 bottom
U$62  [CHG0]  18.16,91.69 0 top
U$63  [#3#3V#0]  15.11,101.85 0 bottom
U$64  [#BYP#0]  15.75,98.04 0 bottom
U$65  [#MEAS#0]  19.18,84.07 0 bottom
U$66  [#VIN#0]  21.21,94.23 0 bottom
U$67  [MICROMOD_LOGO_.5]  83.82,39.12 0 top
U$68  [MICROMOD_LOGO_.5]  38.61,22.1 0 bottom
U$69  [#VE#0]  20.07,91.69 0 bottom
U$70  [QWIIC_CARRIER_#_2X10]  76.2,106.17 0 top
U$71  [RESET3]  131.44,83.69 0 top
U$72  [BOOT2]  140.72,83.69 0 top
U$73  [22229]  144.82,107.57 0 top
U$74  [3V31]  117.22,105.03 0 top
U$75  [SFE_LOGO_FLAME_.2]  133.35,106.3 0 top
U$76  [MICROMOD_LOGO_.5]  193.55,108.71 0 top
U$77  [MICROMOD_LOGO_.5]  148.34,91.69 0 bottom
U$78  [CHG0]  127.89,91.69 0 top
U$79  [#3#3V#0]  124.84,101.85 0 bottom
U$80  [#BYP#0]  125.48,98.04 0 bottom
U$81  [#MEAS#0]  128.91,84.07 0 bottom
U$82  [#VIN#0]  130.94,94.23 0 bottom
U$83  [#VE#0]  129.79,91.69 0 bottom
U$84  [QWIIC_CARRIER_#_2X10]  185.93,106.17 0 top

## Library data of the parts
BYP BYP1-BYP5 JP1-JP18 MEAS MEAS1-MEAS5 = SparkFun-Jumpers
C1 C6 C18 C26 C34 C42 = SparkFun-Capacitors; PROD_ID: CAP-00810
C2 C7 C19 C27 C35 C43 = SparkFun-Capacitors; PROD_ID: CAP-00811
C3 C4 C15 C16 C23 C24 C31 C32 C39 C40 C47 C48 = SparkFun-Capacitors; PROD_ID: CAP-14106
C5 C11 C13 C14 C17 C22 C25 C30 C33 C38 C41 C46 = SparkFun-Capacitors; PROD_ID: CAP-07822
C8 C9 C20 C28 C36 C44 = SparkFun-Capacitors; PROD_ID: CAP-11015
C10 C12 C21 C29 C37 C45 = SparkFun-Capacitors; PROD_ID: CAP-00868
D1 D6 D10 D14 D18 D22 = SparkFun-DiscreteSemi; PROD_ID: DIO-11284
D2 D5 D9 D13 D17 D21 = SparkFun-LED; PROD_ID: DIO-00819
D3 D7 D11 D15 D19 D23 = SparkFun-DiscreteSemi; PROD_ID: DIO-14072
D4 D8 D12 D16 D20 D24 = SparkFun-LED; PROD_ID: DIO-09003
E$1-E$4 FD1-FD24 LOGO1-LOGO18 U$14 U$29 U$43 U$44 U$59 U$75 = SparkFun-Aesthetics
E$5 E$6 = SparkFun-Retired
F1-F6 = SparkFun-Fuses; PROD_ID: RES-14313
H1-H4 H14-H17 H27-H30 H40-H43 H53-H56 H66-H69 = SparkFun-Hardware
H5-H13 H18-H26 H31-H39 H44-H52 H57-H65 H70-H78 = SparkFun-Hardware; PROD_ID: HW-14899
J1 J4 J8 J12 J17 J21 = SparkFun-Connectors; PROD_ID: CONN-14122
J2 J6 J10 J14 J19 J23 = SparkFun-Connectors; PROD_ID: CONN-13694
J3 J7 J11 J16 J20 J24 = SparkFun-Connectors; PROD_ID: CONN-11443; SF_ID: PRT-08612
J5 J9 J13 J15 J18 J22 = SparkFun-MicroMod; PROD_ID: CONN-14877
R1 R10 R17 R23 R29 R35 = SparkFun-Resistors; PROD_ID: RES-08272
R2 R3 R6 R7 R13 R14 R19 R20 R25 R26 R31 R32 = SparkFun-Resistors; PROD_ID: RES-12083
R4 R8 R11 R12 R15 R18 R21 R24 R27 R30 R33 R36 = SparkFun-Resistors; PROD_ID: RES-07856
R5 R9 R16 R22 R28 R34 = SparkFun-Resistors; PROD_ID: RES-07828
S1-S12 = SparkFun-Switches; PROD_ID: SWCH-14139
U1 U3 U6 U8 U10 U12 = SparkFun-IC-Power; PROD_ID: IC-09995
U2 U4 U5 U7 U9 U11 = SparkFun-IC-Power; PROD_ID: VREG-14094
U$1 U$13 U$28 U$42 U$58 U$74 = buzzard_labels (5)
U$2 U$3 U$12 U$25 U$27 U$39 U$41 U$54 U$55 U$57 U$71 U$73 = buzzard_labels (9)
U$4-U$10 U$17 U$18 U$20-U$24 U$32-U$38 U$47-U$53 U$62-U$66 U$69 U$70 U$78-U$84 = output
U$11 U$19 U$26 U$40 U$56 U$72 = buzzard_labels (10)
U$15 U$16 U$30 U$31 U$45 U$46 U$60 U$61 U$67 U$68 U$76 U$77 = SparkFun-MicroMod

## Nets
3.3V: J2.2 J15.2 J15.74 JP4.2 MEAS.2 MEAS.4
3.3V1: J5.2 J5.74 J6.2 JP2.2 MEAS1.2 MEAS1.4
3.3V2: J9.2 J9.74 J10.2 JP7.2 MEAS2.2 MEAS2.4
3.3V3: J13.2 J13.74 J14.2 JP10.2 MEAS3.2 MEAS3.4
3.3V4: J18.2 J18.74 J19.2 JP13.2 MEAS4.2 MEAS4.4
3.3V5: J22.2 J22.74 J23.2 JP16.2 MEAS5.2 MEAS5.4
3.3V_EN: J15.4 JP6.1
3.3V_EN1: J5.4 JP3.1
3.3V_EN2: J9.4 JP8.1
3.3V_EN3: J13.4 JP11.1
3.3V_EN4: J18.4 JP14.1
3.3V_EN5: J22.4 JP17.1
5V: C4.1 D3.C D4.A JP1.2 U1.4
5V1: C16.1 D7.C D8.A JP5.2 U3.4
5V2: C24.1 D11.C D12.A JP9.2 U6.4
5V3: C32.1 D15.C D16.A JP12.2 U8.4
5V4: C40.1 D19.C D20.A JP15.2 U10.4
5V5: C48.1 D23.C D24.A JP18.2 U12.4
!BOOT!: J15.11 S2.3 S2.4
!BOOT!1: J5.11 S4.3 S4.4
!BOOT!2: J9.11 S6.3 S6.4
!BOOT!3: J13.11 S8.3 S8.4
!BOOT!4: J18.11 S10.3 S10.4
!BOOT!5: J22.11 S12.3 S12.4
!RESET!: J15.6 S1.3 S1.4
!RESET!1: J5.6 S3.3 S3.4
!RESET!2: J9.6 S5.3 S5.4
!RESET!3: J13.6 S7.3 S7.4
!RESET!4: J18.6 S9.3 S9.4
!RESET!5: J22.6 S11.3 S11.4
GND: C1.2 C2.- C3.2 C4.2 C9.2 C10.2 C11.2 C13.2 D1.A D2.C H5.1 H6.1 H7.1 H8.1 H9.1 H10.1 H11.1 H12.1 H13.1 J1.GND J1.GND2 J2.1 J3.1 J15.1 J15.7 J15.33 J15.36 J15.39 J15.45 J15.75 R1.1 R2.1 R3.1 S1.1 S1.2 S2.1 S2.2 U1.2 U5.4 U5.EP
GND1: C5.2 C6.2 C7.- C8.2 C12.2 C14.2 C15.2 C16.2 D5.C D6.A H18.1 H19.1 H20.1 H21.1 H22.1 H23.1 H24.1 H25.1 H26.1 J4.GND J4.GND2 J5.1 J5.7 J5.33 J5.36 J5.39 J5.45 J5.75 J6.1 J7.1 R6.1 R7.1 R10.1 S3.1 S3.2 S4.1 S4.2 U2.4 U2.EP U3.2
GND2: C17.2 C18.2 C19.- C20.2 C21.2 C22.2 C23.2 C24.2 D9.C D10.A H31.1 H32.1 H33.1 H34.1 H35.1 H36.1 H37.1 H38.1 H39.1 J8.GND J8.GND2 J9.1 J9.7 J9.33 J9.36 J9.39 J9.45 J9.75 J10.1 J11.1 R13.1 R14.1 R17.1 S5.1 S5.2 S6.1 S6.2 U4.4 U4.EP U6.2
GND3: C25.2 C26.2 C27.- C28.2 C29.2 C30.2 C31.2 C32.2 D13.C D14.A H44.1 H45.1 H46.1 H47.1 H48.1 H49.1 H50.1 H51.1 H52.1 J12.GND J12.GND2 J13.1 J13.7 J13.33 J13.36 J13.39 J13.45 J13.75 J14.1 J16.1 R19.1 R20.1 R23.1 S7.1 S7.2 S8.1 S8.2 U7.4 U7.EP U8.2
GND4: C33.2 C34.2 C35.- C36.2 C37.2 C38.2 C39.2 C40.2 D17.C D18.A H57.1 H58.1 H59.1 H60.1 H61.1 H62.1 H63.1 H64.1 H65.1 J17.GND J17.GND2 J18.1 J18.7 J18.33 J18.36 J18.39 J18.45 J18.75 J19.1 J20.1 R25.1 R26.1 R29.1 S9.1 S9.2 S10.1 S10.2 U9.4 U9.EP U10.2
GND5: C41.2 C42.2 C43.- C44.2 C45.2 C46.2 C47.2 C48.2 D21.C D22.A H70.1 H71.1 H72.1 H73.1 H74.1 H75.1 H76.1 H77.1 H78.1 J21.GND J21.GND2 J22.1 J22.7 J22.33 J22.36 J22.39 J22.45 J22.75 J23.1 J24.1 R31.1 R32.1 R35.1 S11.1 S11.2 S12.1 S12.2 U11.4 U11.EP U12.2
I2C_SCL: J2.4 J15.14
I2C_SCL1: J5.14 J6.4
I2C_SCL2: J9.14 J10.4
I2C_SCL3: J13.14 J14.4
I2C_SCL4: J18.14 J19.4
I2C_SCL5: J22.14 J23.4
I2C_SDA: J2.3 J15.12
I2C_SDA1: J5.12 J6.3
I2C_SDA2: J9.12 J10.3
I2C_SDA3: J13.12 J14.3
I2C_SDA4: J18.12 J19.3
I2C_SDA5: J22.12 J23.3
N$1: C9.1 C10.1 C11.1 MEAS.1 MEAS.3 U5.1
N$2: R1.2 U1.5
N$3: R4.1 U1.1
N$4: JP4.1 R11.2
N$5: C3.1 D3.A J3.2 U1.3
N$6: D2.A R11.1
N$7: J4.A5 R6.2
N$8: D4.C R4.2
N$9: J4.B5 R7.2
N$10: J1.A5 R2.2
N$11: J1.B5 R3.2
N$12: JP2.1 R8.2
N$13: D5.A R8.1
N$14: C8.1 C12.1 C14.1 MEAS1.1 MEAS1.3 U2.1
N$15: R10.2 U3.5
N$16: C15.1 D7.A J7.2 U3.3
N$17: R12.1 U3.1
N$18: D8.C R12.2
N$19: J8.A5 R13.2
N$20: J8.B5 R14.2
N$21: JP7.1 R15.2
N$22: D9.A R15.1
N$23: C20.1 C21.1 C22.1 MEAS2.1 MEAS2.3 U4.1
N$24: R17.2 U6.5
N$25: C23.1 D11.A J11.2 U6.3
N$26: R18.1 U6.1
N$27: D12.C R18.2
N$28: J12.A5 R19.2
N$29: J12.B5 R20.2
N$30: JP10.1 R21.2
N$31: D13.A R21.1
N$32: C28.1 C29.1 C30.1 MEAS3.1 MEAS3.3 U7.1
N$33: R23.2 U8.5
N$34: C31.1 D15.A J16.2 U8.3
N$35: R24.1 U8.1
N$36: D16.C R24.2
N$37: J17.A5 R25.2
N$38: J17.B5 R26.2
N$39: JP13.1 R27.2
N$40: D17.A R27.1
N$41: C36.1 C37.1 C38.1 MEAS4.1 MEAS4.3 U9.1
N$42: R29.2 U10.5
N$43: C39.1 D19.A J20.2 U10.3
N$44: R30.1 U10.1
N$45: D20.C R30.2
N$46: J21.A5 R31.2
N$47: J21.B5 R32.2
N$48: JP16.1 R33.2
N$49: D21.A R33.1
N$50: C44.1 C45.1 C46.1 MEAS5.1 MEAS5.3 U11.1
N$51: R35.2 U12.5
N$52: C47.1 D23.A J24.2 U12.3
N$53: R36.1 U12.1
N$54: D24.C R36.2
USB_D+: J1.A6 J1.B6 J15.3
USB_D+1: J4.A6 J4.B6 J5.3
USB_D+2: J8.A6 J8.B6 J9.3
USB_D+3: J12.A6 J12.B6 J13.3
USB_D+4: J17.A6 J17.B6 J18.3
USB_D+5: J21.A6 J21.B6 J22.3
USB_D-: J1.A7 J1.B7 J15.5
USB_D-1: J4.A7 J4.B7 J5.5
USB_D-2: J8.A7 J8.B7 J9.5
USB_D-3: J12.A7 J12.B7 J13.5
USB_D-4: J17.A7 J17.B7 J18.5
USB_D-5: J21.A7 J21.B7 J22.5
V_USB: BYP.1 F2.1 J1.VBUS1 J1.VBUS2
V_USB1: BYP1.1 F1.1 J4.VBUS1 J4.VBUS2
V_USB2: BYP2.1 F3.1 J8.VBUS1 J8.VBUS2
V_USB3: BYP3.1 F4.1 J12.VBUS1 J12.VBUS2
V_USB4: BYP4.1 F5.1 J17.VBUS1 J17.VBUS2
V_USB5: BYP5.1 F6.1 J21.VBUS1 J21.VBUS2
VIN: BYP.2 C1.1 C2.+ C13.1 F2.2 J15.9 JP1.1 R5.2 U5.8
VIN1: BYP1.2 C5.1 C6.1 C7.+ F1.2 J5.9 JP5.1 R9.2 U2.8
VIN2: BYP2.2 C17.1 C18.1 C19.+ F3.2 J9.9 JP9.1 R16.2 U4.8
VIN3: BYP3.2 C25.1 C26.1 C27.+ F4.2 J13.9 JP12.1 R22.2 U7.8
VIN4: BYP4.2 C33.1 C34.1 C35.+ F5.2 J18.9 JP15.1 R28.2 U9.8
VIN5: BYP5.2 C41.1 C42.1 C43.+ F6.2 J22.9 JP18.1 R34.2 U11.8
VREG_EN: D1.C JP6.2 R5.1 U5.5
VREG_EN1: D6.C JP3.2 R9.1 U2.5
VREG_EN2: D10.C JP8.2 R16.1 U4.5
VREG_EN3: D14.C JP11.2 R22.1 U7.5
VREG_EN4: D18.C JP14.2 R28.1 U9.5
VREG_EN5: D22.C JP17.2 R34.1 U11.5